# Altium PCB RF_Reader.PcbDoc
Units mil, origin at the board's own origin, x right, y up, seen from the top; angles counter-clockwise.
Board outline 2765.94 x 4340.86 mil, 2 copper layers (Top Layer, Bottom Layer); 34 components, 34 nets, 116 pads, 56 vias.
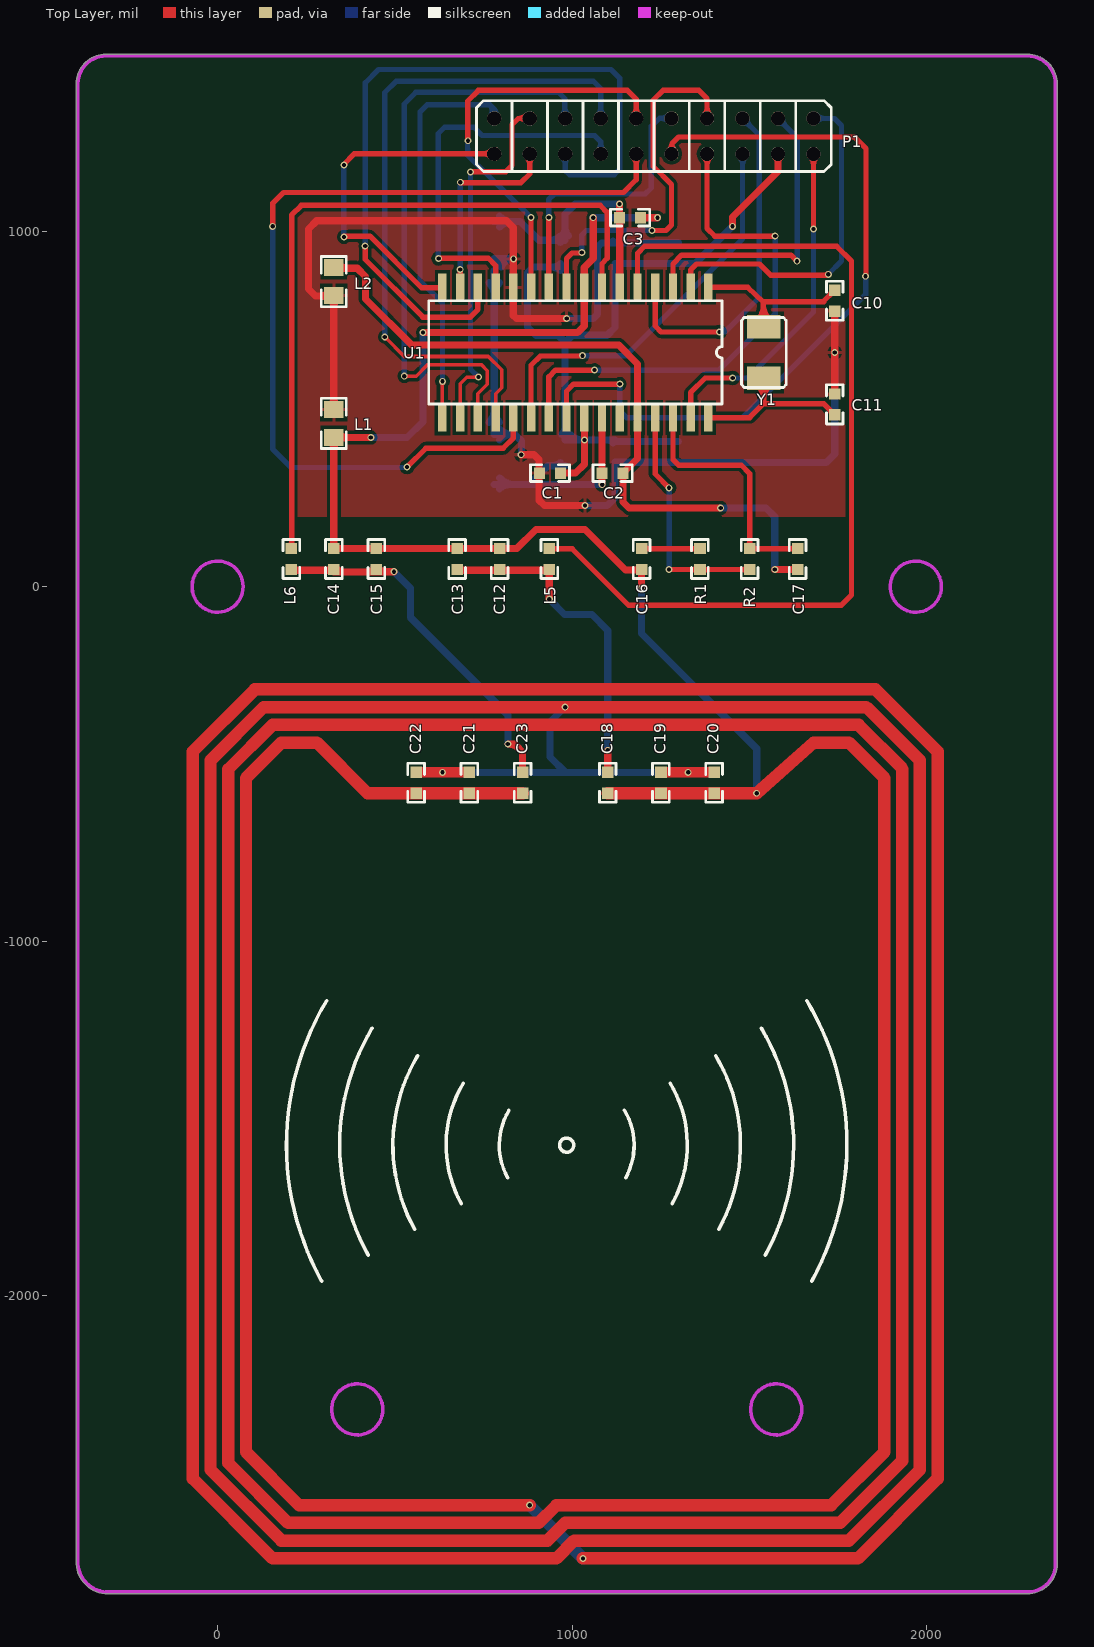
[diagram p0: Top Layer view]
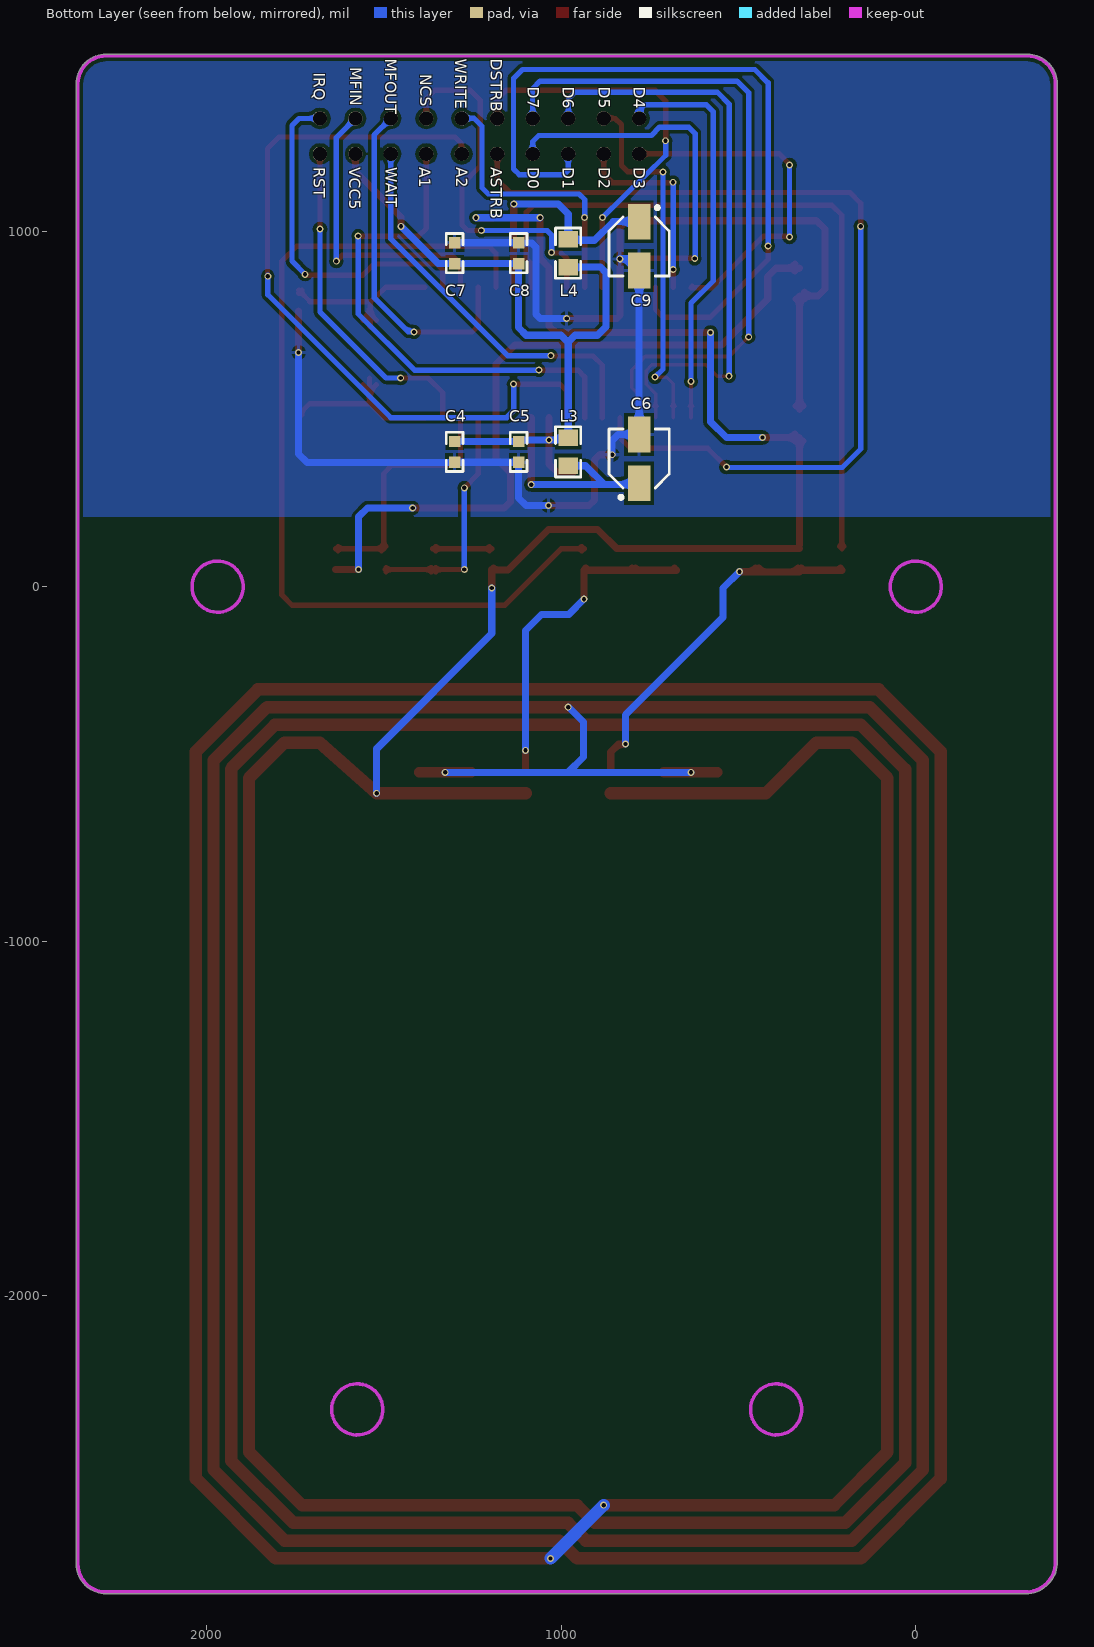
[diagram p1: Bottom Layer view, seen from below]

## Layer stack, top to bottom
Top Layer: signal copper 1.4
Dielectric: dielectric 12.6, FR-4, Dk 4.8
Bottom Layer: signal copper 1.4

## Board outline
-398.7,-2756.25 cw(c-393.7,-2755.91) -398.72,-2755.91 -398.72,1417.32 cw(c-314.96,1417.32) -314.96,1501.08 2283.46,1501.08 cw(c2283.46,1417.32) 2367.22,1417.32 2367.22,-2755.91 cw(c2283.46,-2755.91) 2283.46,-2839.66 -302.98,-2839.66 cw(c-309.06,-2750)

## Design rules (kind name [scope] priority, off if disabled: settings)
Clearance [All] p1: gap=10
MinimumSolderMaskSliver [All] p1: minsoldermaskwidth=0
PolygonConnect [All] p1: connectstyle=Relief reliefconductorwidth=10 reliefentries=4 polygonreliefangle="90 Angle"
RoutingVias [All] p1: holewidth=28 width=50 viastyle="Through Hole" minholewidth=28 minwidth=50 maxholewidth=28 maxwidth=50
SilkToSilkClearance [All] p1: silktosilkclearance=0
SilkscreenOverComponentPads [All] p1: minsilkscreentomaskgap=0
SolderMaskExpansion [All] p1: expansion=4
Width [All] p1: maxlimit=50 minlimit=8 preferedwidth=15
Width Width_Power [InNet('+5V', 'AVCC', 'VCC', '0V', 'AGND', 'GND')] p2: maxlimit=50 minlimit=20 preferedwidth=25
25 further rules are at their usual default settings.

## Components (designator, comment, footprint, x,y, rotation, side; value= is the part's Value field where it differs from the comment)
C1 "Cap" C-0603 937.26,320 r0 top
C2 "Cap" C-0603 1113.74,320 r180 top
C3 "Cap" C-0603 1163,1040 r180 top
C4 "Cap" C-0603 1300,380 r90 bottom
C5 "Cap" C-0603 1120,380 r90 bottom
C6 "Cap Pol1" CAP-4*5.5 780,360 r90 bottom
C7 "Cap" C-0603 1300,940 r270 bottom
C8 "Cap" C-0603 1120,940 r270 bottom
C9 "Cap Pol1" CAP-4*5.5 780,960 r270 bottom
C10 "Cap" C-0603 1740,806.06 r90 top
C11 "Cap" C-0603 1740,513.94 r270 top
C12 "Cap" C-0603 795.12,77.61 r270 top
C13 "Cap" C-0603 675.12,77.61 r270 top
C14 "Cap" C-0603 327.56,77.61 r90 top
C15 "Cap" C-0603 447.56,77.61 r90 top
C16 "Cap" C-0603 1195.59,77.61 r270 top
C17 "Cap" C-0603 1635.59,77.61 r90 top
C18 "Cap" C-0603 1100,-553.15 r90 top
C19 "Cap" C-0603 1250,-553.15 r270 top
C20 "Cap" C-0603 1400,-553.15 r90 top
C21 "Cap" C-0603 710,-553.15 r90 top
C22 "Cap" C-0603 560,-553.15 r90 top
C23 "Cap" C-0603 860,-553.15 r90 top
L1 "Inductor" L-0805 327.56,460 r90 top
L2 "Inductor" L-0805 327.56,860 r90 top
L3 "Inductor" L-0805 980,380 r270 bottom
L4 "Inductor" L-0805 980,940 r90 bottom
L5 "Inductor" L-0603 935.12,77.61 r270 top
L6 "Inductor" L-0603 208,77.61 r270 top
P1 "Header20" HEADER-DIP10*2 1680,1320 r270 top
R1 "Res2" R-0603 1360,77.61 r90 top
R2 "Res2" R-0603 1500,77.61 r270 top
U1 "MFRC500" SOT287-1(32pin) 1008.78,660 r270 top
Y1 "13.56MHz" XTAL-5032(2pin) 1540,660 r270 top

## Footprints (in the part's own frame and the unit in brackets; to place one, negate y for a bottom-side part, rotate by r counter-clockwise, add the part's x,y. Pads: shape width x height; smd on the part's side, far side on the other; paste and mask are expansions set on the pad)
C-0603 [mm]
  rect 0.8x0.83 smd: 1(-0.75,0) 2(0.75,0)
  silkscreen extent -1.4,-0.6 1.4,0.6
CAP-4*5.5 [mm]
  rect 2.55x1.6 smd: 1(-1.75,0) 2(1.75,0)
  silkscreen extent -2.87,-2.15 2.15,2.15
HEADER-DIP10*2 [mm]
  round 1.02 hole 1.02: 1(0,0) 2(0,-2.54) 3(0,-5.08) 4(0,-7.62) 5(0,-10.16) 6(0,-12.7) 7(0,-15.24) 8(0,-17.78) 9(0,-20.32) 10(0,-22.86) 11(2.54,-22.86) 12(2.54,-20.32) 13(2.54,-17.78) 14(2.54,-15.24) 15(2.54,-12.7) 16(2.54,-10.16) 17(2.54,-7.62) 18(2.54,-5.08) 19(2.54,-2.54) 20(2.54,0)
  silkscreen extent -1.27,-24.13 3.81,1.27
L-0603 [mm]
  rect 0.8x0.83 smd: 1(-0.75,0) 2(0.75,0)
  silkscreen extent -1.4,-0.6 1.4,0.6
L-0805 [mm]
  rect 1.2x1.4 smd: 1(-1,0) 2(1,0)
  silkscreen extent -1.8,-0.9 1.8,0.9
R-0603 [mm]
  rect 0.8x0.83 smd: 1(-0.75,0) 2(0.75,0)
  silkscreen extent -1.4,-0.6 1.4,0.6
SOT287-1(32pin) [mm]
  rect 2x0.6 smd: 1(-4.663,9.525) 2(-4.663,8.255) 3(-4.663,6.985) 4(-4.663,5.715) 5(-4.663,4.445) 6(-4.663,3.175) 8(-4.663,0.635) 9(-4.663,-0.635) 10(-4.663,-1.905) 11(-4.663,-3.175) 12(-4.663,-4.445) 13(-4.663,-5.715) 14(-4.663,-6.985) 15(-4.663,-8.255) 16(-4.663,-9.525) 17(4.663,-9.525) 18(4.663,-8.255) 19(4.663,-6.985) 20(4.663,-5.715) 21(4.663,-4.445) 22(4.663,-3.175) 23(4.663,-1.905) 24(4.663,-0.635) 25(4.663,0.635) 26(4.663,1.905) 27(4.663,3.175) 28(4.663,4.445) 29(4.663,5.715) 30(4.663,6.985) 31(4.663,8.255) 32(4.663,9.525)
  rect 2x0.6 smd mask+0.102: 7(-4.663,1.905)
  silkscreen extent -3.71,-10.5 3.69,10.5
XTAL-5032(2pin) [mm]
  rect 1.7x2.4 smd: 1(-1.85,0) 2(1.85,0)
  silkscreen extent -2.5,-1.6 2.5,1.6

## Part data
C1 C2 C3 C4 C5 C7 C8 C10 C11 C12 C13 C14 C15 C16 C17 C18 C19 C20 C21 C22 C23: "Capacitor"
C6 C9: "Polarized Capacitor (Radial)"
P1: "Output DataLine for this module."
R1 R2: "Resistor"
U1: "highly integrated reader ICs for contactless  communication on 13,56MHz"
Y1: library part XTAL, "Crystal Oscillator"

## Via types
v1: diameter 19.68, hole 11.81, Top Layer to Bottom Layer, tented both sides, 56 vias

## Nets (pads, with @x,y where several pads share a name; then routed paths per layer and width w, separated by ;. In a path a pad name is that pad's centre, name@x,y a point inside that pad or via, vN(x,y) a via of type N, cw(c..) or ccw(c..) an arc to the next point about the centre after c; other vN are vias at no path point)
0V: C3.1 C12.1 C13.1 C14.2 C15.2 C16.2 C18.1 C19.1 C19.2 C20.1 C20.2 C21.1 C21.2 C22.1 C22.2 C23.1 L1.1 U1.8 | length 37546.1
  Top Layer w20: C14.2 C13.1@669.72,107.14 ; C14.2@327.56,117.68 L1.1 ; L1.1@327.56,420 v1(431.81,420) ; v1@578.74,716 1015.21,716 1033.78,734.57 U1.8 1033.78,899.1 ; C13.1 843.36,107.14 897.64,161.42 1035.43,161.42 1149.61,47.24 1194.75,47.24 C16.2 v1@1195.59,-2.68 ; 1033.78,899.92 1059.06,925.2 v1(1059.05,1040) ; C3.1 v1(1240.16,1040) ; L1.1@317.93,411 cw(c294.67,387.74) 327.56,387.74 ; L1.1@317.93,411 cw(c294.67,387.74) 327.56,387.74 ; L1.1@317.93,411 cw(c294.67,387.74) 327.56,387.74 ; 327.56,387.75 cw(c360.44,387.75) L1.1@337.19,411 ; 327.56,387.75 cw(c360.44,387.75) L1.1@337.19,411 ; 327.56,387.75 cw(c360.44,387.75) L1.1@337.19,411 ; L1.1@341.13,411 cw(c362.86,389.26) 362.86,420 ; L1.1@341.13,411 cw(c362.86,389.26) 362.86,420 ; L1.1@341.13,411 cw(c362.86,389.26) 362.86,420 ; L1.1@341.13,430.26 ccw(c365.9,455.04) 365.9,420 ; L1.1@341.13,430.26 ccw(c365.9,455.04) 365.9,420 ; L1.1@341.13,430.26 ccw(c365.9,455.04) 365.9,420 ; 1179.09,47.24 ccw(c1179.09,64) C16.2@1190.94,52.15 ; 1179.09,47.24 ccw(c1179.09,64) C16.2@1190.94,52.15 ; 1179.09,47.24 ccw(c1179.09,64) C16.2@1190.94,52.15
  Top Layer w30: C22.2 v1(633.86,-523.62) C21.2 ; C19.1@1253.62,-523.62 C20.2
  Top Layer w35: C22.1@550,-582.68 422.68,-582.68 280,-440 180,-440 80,-540 80,-2440 230,-2590 v1(880,-2590) ; C22.1 C21.1 C23.1 ; v1(1030,-2740) 1805,-2740 2030,-2515 2030,-465 1855,-290 105,-290 -70,-465 -70,-2515 155,-2740 955,-2740 1005,-2690 1780,-2690 1980,-2490 1980,-490 1832.52,-342.52 ; C18.1 C19.2 C20.1 v1(1520,-582.68) 1680,-440 1780,-440 1880,-540 1880,-2440 1730,-2590 955,-2590 905,-2640 199.05,-2640 30,-2470.95 30,-515 155,-390 1807.32,-390 1929.13,-511.81 ; 1828.19,-340 v1(980,-340) 130,-340 -20,-490 -20,-2490 180,-2690 930,-2690 980,-2640 1755,-2640 1930,-2465 1930,-515
  Bottom Layer w20: v1(431.81,420) 534.17,420 578.74,464.57 v1@578.74,716 ; v1(633.86,-523.62) v1(1326.77,-523.62) ; v1@979.45,-339.45 937.01,-381.89 937.01,-480.63 980,-523.62 ; v1(1059.05,1040) v1(1240.16,1040) ; v1(1195.59,-3.94) 1195.59,-132.6 1520,-457.01 v1(1520,-582.68)
  Bottom Layer w35: v1(880,-2590) v1(1030,-2740)
  other v1: 578.74,716.22
+5V: C3.2 C9.1 L4.2 U1.6 | length 1251.1
  Top Layer w20: C3.2 v1@1133.47,1078.75 ; U1.6 C3.2@1133.78,1040
  Bottom Layer w20: C9.1 853.4,1028.9 853.83,1028.46 853.83,1028.34 905.79,976.38 980,976.38 980,1050.87 1008.19,1079.05 v1(1133.47,1079.05) ; C9.1@795.2,1013.7 cw(c831.9,977) 831.9,1028.9 ; C9.1@795.2,1013.7 cw(c831.9,977) 831.9,1028.9 ; C9.1@795.2,1013.7 cw(c831.9,977) 831.9,1028.9 ; C9.1@795.2,1044.1 ccw(c831.9,1080.79) 831.9,1028.9 ; C9.1@795.2,1044.1 ccw(c831.9,1080.79) 831.9,1028.9 ; C9.1@795.2,1044.1 ccw(c831.9,1080.79) 831.9,1028.9 ; 935.95,976.38 ccw(c935.95,1019.48) L4.2@966.43,989 ; 935.95,976.38 ccw(c935.95,1019.48) L4.2@966.43,989 ; 935.95,976.38 ccw(c935.95,1019.48) L4.2@966.43,989 ; 950.4,976.38 cw(c950.4,953.71) L4.2@966.43,969.74 ; 950.4,976.38 cw(c950.4,953.71) L4.2@966.43,969.74 ; 950.4,976.38 cw(c950.4,953.71) L4.2@966.43,969.74 ; L4.2@970.37,989 ccw(c947.11,1012.26) 980,1012.26 ; L4.2@970.37,989 ccw(c947.11,1012.26) 980,1012.26 ; L4.2@970.37,989 ccw(c947.11,1012.26) 980,1012.26 ; 980,1012.26 ccw(c1012.89,1012.26) L4.2@989.63,989 ; 980,1012.26 ccw(c1012.89,1012.26) L4.2@989.63,989 ; 980,1012.26 ccw(c1012.89,1012.26) L4.2@989.63,989
A1: P1.17 U1.23 | length 1600.2
  Top Layer w15: U1.23 933.78,591.26 952.76,610.24 v1(1062.99,610.24) ; P1.17 1380,1009.76 1401.57,988.19 v1(1572,988.19) ; P1.17@1371.11,1211.11 cw(c1349.63,1189.63) 1380,1189.63 ; P1.17@1371.11,1211.11 cw(c1349.63,1189.63) 1380,1189.63 ; P1.17@1371.11,1211.11 cw(c1349.63,1189.63) 1380,1189.63 ; 1380,1189.63 cw(c1410.37,1189.63) P1.17@1388.89,1211.11 ; 1380,1189.63 cw(c1410.37,1189.63) P1.17@1388.89,1211.11 ; 1380,1189.63 cw(c1410.37,1189.63) P1.17@1388.89,1211.11
  Bottom Layer w15: v1(1062.99,610.24) 1413.39,610.24 1572,768.85 v1(1572,988.19)
A2: P1.16 U1.24 | length 2296.6
  Top Layer w15: U1.24 983.78,550.71 1003.94,570.87 v1(1133.86,570.87) ; P1.16@1281,1220 1281,1249.5 ; v1@1828,875 1828,1234.99 1795.28,1267.72 1299.21,1267.72 1281,1249.5 ; P1.16@1271.82,1229.55 ccw(c1254.74,1249.5) 1281,1249.5 ; P1.16@1271.82,1229.55 ccw(c1254.74,1249.5) 1281,1249.5 ; P1.16@1271.82,1229.55 ccw(c1254.74,1249.5) 1281,1249.5 ; 1281,1247.95 ccw(c1307.95,1247.95) P1.16@1288.89,1228.89 ; 1281,1247.95 ccw(c1307.95,1247.95) P1.16@1288.89,1228.89 ; 1281,1247.95 ccw(c1307.95,1247.95) P1.16@1288.89,1228.89
  Bottom Layer w15: v1(1133.86,570.87) 1133.86,496.06 1153.54,476.38 1480.32,476.38 1827,823.06 v1@1827,878.18
  other v1: 1827,875
AGND: C2.1 C17.1 L2.2 U1.28 | length 2224.5
  Top Layer w20: L2.2@327.56,897.64 393.7,897.64 417.32,874.02 417.32,811.02 547.24,681.1 1130.9,681.1 1184,628 1184,476.43 1183.78,476.21 1183.78,360.95 C2.1@1143.05,320.22 ; C2.1 1143.27,238.62 1160.31,221.58 v1(1418.43,221.58) ; v1(1570.87,48.09) C17.1 ; L2.2@341.13,889.74 cw(c360.2,870.67) 360.2,897.64 ; L2.2@341.13,889.74 cw(c360.2,870.67) 360.2,897.64 ; L2.2@341.13,889.74 cw(c360.2,870.67) 360.2,897.64 ; L2.2@341.13,909 ccw(c368.56,936.44) 368.56,897.64 ; L2.2@341.13,909 ccw(c368.56,936.44) 368.56,897.64 ; L2.2@341.13,909 ccw(c368.56,936.44) 368.56,897.64
  Bottom Layer w20: v1(1418.43,221.58) 1546.14,221.58 1570.87,196.85 v1(1570.87,48.09)
ASTRB: P1.15 U1.21 | length 2752.4
  Top Layer w15: v1(155.25,1015.75) 155.25,1080.45 185.8,1111 1143.91,1111 1180,1147.09 P1.15 ; v1(534,337) 587,390 805,390 833.78,418.78 U1.21 ; P1.15@1171.11,1211.11 cw(c1149.63,1189.63) 1180,1189.63 ; P1.15@1171.11,1211.11 cw(c1149.63,1189.63) 1180,1189.63 ; P1.15@1171.11,1211.11 cw(c1149.63,1189.63) 1180,1189.63 ; 1180,1189.63 cw(c1210.37,1189.63) P1.15@1188.89,1211.11 ; 1180,1189.63 cw(c1210.37,1189.63) P1.15@1188.89,1211.11 ; 1180,1189.63 cw(c1210.37,1189.63) P1.15@1188.89,1211.11
  Bottom Layer w15: v1(155.25,1015.75) 155.25,388.05 207.31,336 v1@534,336
AVCC5: C2.2 C6.1 L3.2 U1.26 | length 913.6
  Top Layer w20: v1(1084.21,287.4) C2.2 U1.26@1084.21,476.43
  Bottom Layer w20: C6.1@780,287.4 v1(1084.21,287.4) ; 877.87,287.48 931.02,340.63 L3.2 ; L3.2@966.43,331 ccw(c943.18,307.74) 943.18,340.63 ccw(c943.18,373.52) L3.2@966.43,350.26 ; C6.1@795.2,275.9 cw(c822.96,248.14) 822.96,287.4 ; C6.1@795.2,275.9 cw(c822.96,248.14) 822.96,287.4 ; C6.1@795.2,275.9 cw(c822.96,248.14) 822.96,287.4 ; C6.1@795.2,306.3 ccw(c840.83,351.93) 840.83,287.4 ; C6.1@795.2,306.3 ccw(c840.83,351.93) 840.83,287.4 ; C6.1@795.2,306.3 ccw(c840.83,351.93) 840.83,287.4
D0: P1.14 U1.13 | length 1242.3
  Top Layer w15: v1@624.16,926 762.98,926 783.78,905.2 U1.13
  Bottom Layer w15: v1(623.24,925.09) 622.05,926.28 622.05,1276.89 640.43,1295.28 722.06,1295.28 745.68,1271.65 1062.99,1271.65 1080,1254.65 P1.14 ; P1.14@1071.11,1228.89 ccw(c1049.63,1250.37) 1080,1250.37 ; P1.14@1071.11,1228.89 ccw(c1049.63,1250.37) 1080,1250.37 ; P1.14@1071.11,1228.89 ccw(c1049.63,1250.37) 1080,1250.37 ; 1080,1250.37 ccw(c1110.37,1250.37) P1.14@1088.89,1228.89 ; 1080,1250.37 ccw(c1110.37,1250.37) P1.14@1088.89,1228.89 ; 1080,1250.37 ccw(c1110.37,1250.37) P1.14@1088.89,1228.89
D1: P1.13 U1.14 | length 2308.7
  Top Layer w15: v1(416.24,960.02) 416.24,922.34 578.74,759.84 712.6,759.84 733.78,781.02 U1.14
  Bottom Layer w15: v1(416.24,960.02) 416.24,1420.18 454.15,1458.09 1108.84,1458.09 1134,1432.93 1134,1177.31 1118.11,1161.42 992.13,1161.42 980,1173.54 P1.13 ; P1.13@971.11,1211.11 cw(c949.63,1189.63) 980,1189.63 ; P1.13@971.11,1211.11 cw(c949.63,1189.63) 980,1189.63 ; P1.13@971.11,1211.11 cw(c949.63,1189.63) 980,1189.63 ; 980,1189.63 cw(c1010.37,1189.63) P1.13@988.89,1211.11 ; 980,1189.63 cw(c1010.37,1189.63) P1.13@988.89,1211.11 ; 980,1189.63 cw(c1010.37,1189.63) P1.13@988.89,1211.11
D2: P1.12 U1.15 | length 702.9
  Top Layer w15: U1.15 v1@683.78,894 ; v1@684.24,1139 855.54,1139 880,1163.46 P1.12 ; P1.12@871.11,1211.11 cw(c849.63,1189.63) 880,1189.63 ; P1.12@871.11,1211.11 cw(c849.63,1189.63) 880,1189.63 ; P1.12@871.11,1211.11 cw(c849.63,1189.63) 880,1189.63 ; 880,1189.63 cw(c910.37,1189.63) P1.12@888.89,1211.11 ; 880,1189.63 cw(c910.37,1189.63) P1.12@888.89,1211.11 ; 880,1189.63 cw(c910.37,1189.63) P1.12@888.89,1211.11
  Bottom Layer w15: v1@684.24,893.09 v1(684.24,1140)
  other v1: 684,894
D3: P1.11 U1.16 | length 1182.6
  Top Layer w15: v1@354.84,1189.49 384.35,1220 P1.11 ; v1@355.33,988 429.32,988 574.8,842.52 U1.16@632.73,842.52 ; v1@357.66,984.34 cw(c366.48,975.52) 366.48,988 ; v1@357.66,984.34 cw(c366.48,975.52) 366.48,988 ; v1@357.66,984.34 cw(c366.48,975.52) 366.48,988 ; 620.84,842.52 ccw(c620.84,856.51) U1.16@630.73,846.62 ; 620.84,842.52 ccw(c620.84,856.51) U1.16@630.73,846.62 ; 620.84,842.52 ccw(c620.84,856.51) U1.16@630.73,846.62 ; 749.63,1220 ccw(c749.63,1250.37) P1.11@771.11,1228.89 ; 749.63,1220 cw(c749.63,1189.63) P1.11@771.11,1211.11 ; 749.63,1220 ccw(c749.63,1250.37) P1.11@771.11,1228.89 ; 749.63,1220 cw(c749.63,1189.63) P1.11@771.11,1211.11 ; 749.63,1220 ccw(c749.63,1250.37) P1.11@771.11,1228.89 ; 749.63,1220 cw(c749.63,1189.63) P1.11@771.11,1211.11
  Bottom Layer w15: v1@356,987 v1(356,1188.33)
  other v1: 356,986
D4: P1.10 U1.17 | length 1690.1
  Top Layer w10: U1.17 v1(633.78,578.74) ; U1.17@628.96,508.81 ccw(c617.34,520.43) 633.78,520.43 ; U1.17@628.96,508.81 ccw(c617.34,520.43) 633.78,520.43 ; U1.17@628.96,508.81 ccw(c617.34,520.43) 633.78,520.43 ; v1@630.36,575.32 cw(c622.09,567.05) 633.78,567.05 ; v1@630.36,575.32 cw(c622.09,567.05) 633.78,567.05 ; v1@630.36,575.32 cw(c622.09,567.05) 633.78,567.05 ; 633.78,520.43 ccw(c650.22,520.43) U1.17@638.6,508.81 ; 633.78,520.43 ccw(c650.22,520.43) U1.17@638.6,508.81 ; 633.78,520.43 ccw(c650.22,520.43) U1.17@638.6,508.81 ; 633.78,567.05 cw(c645.47,567.05) v1@637.2,575.32 ; 633.78,567.05 cw(c645.47,567.05) v1@637.2,575.32 ; 633.78,567.05 cw(c645.47,567.05) v1@637.2,575.32
  Bottom Layer w15: v1@633.86,578.82 633.86,799.21 570.87,862.2 570.87,1338.58 590.55,1358.27 767.72,1358.27 779.5,1346.48 ; P1.10@779.5,1319.5 779.5,1346.48 ; 766.51,1359.48 cw(c748.44,1341.4) P1.10@769.59,1327.06 ; 766.51,1359.48 cw(c748.44,1341.4) P1.10@769.59,1327.06 ; 766.51,1359.48 cw(c748.44,1341.4) P1.10@769.59,1327.06 ; P1.10@771.75,1329.5 ccw(c757.01,1346.48) 779.5,1346.48 ; P1.10@771.75,1329.5 ccw(c757.01,1346.48) 779.5,1346.48 ; P1.10@771.75,1329.5 ccw(c757.01,1346.48) 779.5,1346.48 ; 773.27,1352.71 cw(c748.68,1328.12) P1.10@782.34,1319.39 ; 773.27,1352.71 cw(c748.68,1328.12) P1.10@782.34,1319.39 ; 773.27,1352.71 cw(c748.68,1328.12) P1.10@782.34,1319.39 ; 779.34,1346.64 cw(c763.73,1331.03) P1.10@782,1318.64 ; 779.34,1346.64 cw(c763.73,1331.03) P1.10@782,1318.64 ; 779.34,1346.64 cw(c763.73,1331.03) P1.10@782,1318.64 ; 779.5,1346.48 ccw(c800.27,1346.48) P1.10@787.65,1329.99 ; 779.5,1346.48 ccw(c800.27,1346.48) P1.10@787.65,1329.99 ; 779.5,1346.48 ccw(c800.27,1346.48) P1.10@787.65,1329.99
D5: P1.9 U1.18 | length 1314.7
  Top Layer w10: U1.18 683.78,571.78 702.55,590.55 v1(735.24,590.55) ; U1.18@678.96,508.81 ccw(c667.34,520.43) 683.78,520.43 ; U1.18@678.96,508.81 ccw(c667.34,520.43) 683.78,520.43 ; U1.18@678.96,508.81 ccw(c667.34,520.43) 683.78,520.43 ; 683.78,520.43 ccw(c700.22,520.43) U1.18@688.6,508.81 ; 683.78,520.43 ccw(c700.22,520.43) U1.18@688.6,508.81 ; 683.78,520.43 ccw(c700.22,520.43) U1.18@688.6,508.81 ; 723.55,590.55 ccw(c723.55,602.24) v1@731.82,593.97 ; 723.55,590.55 cw(c723.55,578.86) v1@731.82,587.13 ; 723.55,590.55 ccw(c723.55,602.24) v1@731.82,593.97 ; 723.55,590.55 cw(c723.55,578.86) v1@731.82,587.13 ; 723.55,590.55 ccw(c723.55,602.24) v1@731.82,593.97 ; 723.55,590.55 cw(c723.55,578.86) v1@731.82,587.13
  Top Layer w15: v1@713,1170 813,1170 830,1187 830,1302.44 847.56,1320 P1.9 ; 849.63,1320 ccw(c849.63,1350.37) P1.9@871.11,1328.89 ; 849.63,1320 cw(c849.63,1289.63) P1.9@871.11,1311.11 ; 849.63,1320 ccw(c849.63,1350.37) P1.9@871.11,1328.89 ; 849.63,1320 cw(c849.63,1289.63) P1.9@871.11,1311.11 ; 849.63,1320 ccw(c849.63,1350.37) P1.9@871.11,1328.89 ; 849.63,1320 cw(c849.63,1289.63) P1.9@871.11,1311.11
  Bottom Layer w15: v1@713,1169 713,612.79 v1(735.24,590.55)
  other v1: 713,1168.72
D6: P1.8 U1.19 | length 1970.9
  Top Layer w10: v1(526.24,593.09) 559.92,593.09 591.83,625 744,625 760.09,608.91 760.09,570.09 733.78,543.78 U1.19 ; v1@529.67,589.66 cw(c537.93,581.4) 537.93,593.09 ; v1@529.67,589.66 cw(c537.93,581.4) 537.93,593.09 ; v1@529.67,589.66 cw(c537.93,581.4) 537.93,593.09 ; v1@529.67,596.51 ccw(c537.93,604.78) 537.93,593.09 ; v1@529.67,596.51 ccw(c537.93,604.78) 537.93,593.09 ; v1@529.67,596.51 ccw(c537.93,604.78) 537.93,593.09 ; U1.19@728.96,508.81 ccw(c717.34,520.43) 733.78,520.43 ; U1.19@728.96,508.81 ccw(c717.34,520.43) 733.78,520.43 ; U1.19@728.96,508.81 ccw(c717.34,520.43) 733.78,520.43 ; 733.78,520.43 ccw(c750.22,520.43) U1.19@738.6,508.81 ; 733.78,520.43 ccw(c750.22,520.43) U1.19@738.6,508.81 ; 733.78,520.43 ccw(c750.22,520.43) U1.19@738.6,508.81
  Bottom Layer w15: v1(526.24,593.09) 526.24,1360.89 559.06,1393.7 960.63,1393.7 979,1375.33 P1.8@979,1319 ; P1.8@971.11,1328.89 ccw(c952.05,1347.95) 979,1347.95 ; P1.8@971.11,1328.89 ccw(c952.05,1347.95) 979,1347.95 ; P1.8@971.11,1328.89 ccw(c952.05,1347.95) 979,1347.95 ; 979,1352.78 ccw(c1012.78,1352.78) P1.8@988.89,1328.89 ; 979,1352.78 ccw(c1012.78,1352.78) P1.8@988.89,1328.89 ; 979,1352.78 ccw(c1012.78,1352.78) P1.8@988.89,1328.89
D7: P1.7 U1.20 | length 2189
  Top Layer w10: v1(471.24,704.09) 526.61,648.72 763.28,648.72 801,611 801,561 783.78,543.78 U1.20 ; v1@471.24,699.24 cw(c471.24,687.55) 479.51,695.82 ; v1@471.24,699.24 cw(c471.24,687.55) 479.51,695.82 ; v1@471.24,699.24 cw(c471.24,687.55) 479.51,695.82 ; v1@476.09,704.09 ccw(c487.78,704.09) 479.51,695.82 ; v1@476.09,704.09 ccw(c487.78,704.09) 479.51,695.82 ; v1@476.09,704.09 ccw(c487.78,704.09) 479.51,695.82 ; U1.20@778.96,508.81 ccw(c767.34,520.43) 783.78,520.43 ; U1.20@778.96,508.81 ccw(c767.34,520.43) 783.78,520.43 ; U1.20@778.96,508.81 ccw(c767.34,520.43) 783.78,520.43 ; 783.78,520.43 ccw(c800.22,520.43) U1.20@788.6,508.81 ; 783.78,520.43 ccw(c800.22,520.43) U1.20@788.6,508.81 ; 783.78,520.43 ccw(c800.22,520.43) U1.20@788.6,508.81
  Bottom Layer w15: v1(471.24,704.09) 471.24,1392.5 503.94,1425.2 1059.05,1425.2 1080.5,1403.75 P1.7@1080.5,1320.5 ; P1.7@1071.11,1328.89 ccw(c1048.43,1351.57) 1080.5,1351.57 ; P1.7@1071.11,1328.89 ccw(c1048.43,1351.57) 1080.5,1351.57 ; P1.7@1071.11,1328.89 ccw(c1048.43,1351.57) 1080.5,1351.57 ; 1080.5,1349.16 ccw(c1109.16,1349.16) P1.7@1088.89,1328.89 ; 1080.5,1349.16 ccw(c1109.16,1349.16) P1.7@1088.89,1328.89 ; 1080.5,1349.16 ccw(c1109.16,1349.16) P1.7@1088.89,1328.89
DSTRB: P1.6 U1.11 | length 1295.5
  Top Layer w15: v1@705.24,1257 705.24,1369.24 735,1399 1155.76,1399 1180,1374.76 P1.6 ; U1.11 v1@883.78,1040.7 ; P1.6@1171.11,1328.89 ccw(c1149.63,1350.37) 1180,1350.37 ; P1.6@1171.11,1328.89 ccw(c1149.63,1350.37) 1180,1350.37 ; P1.6@1171.11,1328.89 ccw(c1149.63,1350.37) 1180,1350.37 ; 1180,1350.37 ccw(c1210.37,1350.37) P1.6@1188.89,1328.89 ; 1180,1350.37 ccw(c1210.37,1350.37) P1.6@1188.89,1328.89 ; 1180,1350.37 ccw(c1210.37,1350.37) P1.6@1188.89,1328.89
  Bottom Layer w15: v1@704.71,1256.99 705.07,1216.21 v1(883.67,1040.7)
  other v1: 706,1257
GND: C1.1 C4.1 C5.1 C6.2 C7.1 C8.1 C9.2 C10.1 C11.1 L1.2 L2.1 U1.12 | length 5833.5
  Top Layer w20: L1.2 327.56,818.9 275.59,818.9 255.91,838.58 255.91,1007.87 279.53,1031.5 814.96,1031.5 833.66,1012.8 833.66,764.76 842.52,755.91 v1(984.25,755.91) ; v1(856,371.75) 892.03,371.75 906.07,357.71 906.07,243.54 921.26,228.35 v1@1035.43,228.35 ; C11.1 C10.1 ; 286.55,818.9 ccw(c286.55,857.7) L2.1@313.99,830.26 ; 286.55,818.9 ccw(c286.55,857.7) L2.1@313.99,830.26 ; 286.55,818.9 ccw(c286.55,857.7) L2.1@313.99,830.26 ; 294.92,818.9 cw(c294.92,791.93) L2.1@313.99,811 ; 294.92,818.9 cw(c294.92,791.93) L2.1@313.99,811 ; 294.92,818.9 cw(c294.92,791.93) L2.1@313.99,811 ; L1.2@317.93,509 ccw(c294.67,532.26) 327.56,532.26 ; L1.2@317.93,509 ccw(c294.67,532.26) 327.56,532.26 ; L1.2@317.93,509 ccw(c294.67,532.26) 327.56,532.26 ; L2.1@317.93,811 cw(c294.67,787.74) 327.56,787.74 ; L2.1@317.93,811 cw(c294.67,787.74) 327.56,787.74 ; L2.1@317.93,811 cw(c294.67,787.74) 327.56,787.74 ; 327.56,532.26 ccw(c360.45,532.26) L1.2@337.19,509 ; 327.56,532.26 ccw(c360.45,532.26) L1.2@337.19,509 ; 327.56,532.26 ccw(c360.45,532.26) L1.2@337.19,509 ; 327.56,787.74 cw(c360.45,787.74) L2.1@337.19,811 ; 327.56,787.74 cw(c360.45,787.74) L2.1@337.19,811 ; 327.56,787.74 cw(c360.45,787.74) L2.1@337.19,811 ; 906.07,301.52 cw(c925.62,301.52) C1.1@911.8,315.34 ; 906.07,301.52 cw(c925.62,301.52) C1.1@911.8,315.34 ; 906.07,301.52 cw(c925.62,301.52) C1.1@911.8,315.34 ; 906.07,338.48 ccw(c925.62,338.48) C1.1@911.8,324.66 ; 906.07,338.48 ccw(c925.62,338.48) C1.1@911.8,324.66 ; 906.07,338.48 ccw(c925.62,338.48) C1.1@911.8,324.66
  Bottom Layer w20: C9.2 C6.2 838.82,428.9 856.3,411.42 v1@856.3,372.05 ; C9.2@780,924.21 v1(834.65,924.21) ; C9.2@788.11,916.11 C9.2@792.55,916.11 ; v1(984.25,755.91) 1059.06,755.91 1070.87,767.72 1070.87,956.69 1082.68,968.5 1118.98,968.5 C8.1 C7.1 ; v1(1035.45,228.33) 1098.41,228.33 1120,249.92 C5.1 C4.1 ; C4.1@1306.46,346.46 1310.4,350.39 1716.54,350.39 1740,373.86 v1(1740,660) ; C6.2@764.8,462.8 ccw(c728.1,499.49) 780,499.49 ; C6.2@764.8,462.8 ccw(c728.1,499.49) 780,499.49 ; C6.2@764.8,462.8 ccw(c728.1,499.49) 780,499.49 ; C9.2@764.8,857.2 cw(c728.1,820.51) 780,820.51 ; C9.2@764.8,857.2 cw(c728.1,820.51) 780,820.51 ; C9.2@764.8,857.2 cw(c728.1,820.51) 780,820.51 ; 780,499.49 ccw(c831.9,499.49) C6.2@795.2,462.8 ; 780,499.49 ccw(c831.9,499.49) C6.2@795.2,462.8 ; 780,499.49 ccw(c831.9,499.49) C6.2@795.2,462.8 ; 780,820.51 cw(c831.9,820.51) C9.2@795.2,857.2 ; 780,820.51 cw(c831.9,820.51) C9.2@795.2,857.2 ; 780,820.51 cw(c831.9,820.51) C9.2@795.2,857.2 ; C6.2@795.2,413.7 cw(c831.9,377) 831.9,428.9 ; C6.2@795.2,413.7 cw(c831.9,377) 831.9,428.9 ; C6.2@795.2,413.7 cw(c831.9,377) 831.9,428.9 ; C6.2@795.2,444.1 ccw(c831.9,480.79) 831.9,428.9 ; C6.2@795.2,444.1 ccw(c831.9,480.79) 831.9,428.9 ; C6.2@795.2,444.1 ccw(c831.9,480.79) 831.9,428.9 ; C9.2@799.73,901.27 cw(c834.64,886.17) v1(834.65,924.21) ; C9.2@799.73,901.27 cw(c834.64,886.17) v1(834.65,924.21) ; C9.2@799.73,901.27 cw(c834.64,886.17) v1(834.65,924.21) ; 1103.06,968.5 ccw(c1103.06,985.88) C8.1@1115.34,973.59 ; 1103.06,968.5 ccw(c1103.06,985.88) C8.1@1115.34,973.59 ; 1103.06,968.5 ccw(c1103.06,985.88) C8.1@1115.34,973.59
IRQ: P1.1 U1.2 | length 1155.8
  Top Layer w15: U1.2 1333.78,892.84 1350.39,909.45 1527.56,909.45 1559.06,877.95 v1@1720.47,877.95 ; 1709.71,877.95 ccw(c1709.71,892.65) v1@1720.1,882.26 ; 1709.71,877.95 ccw(c1709.71,892.65) v1@1720.1,882.26 ; 1709.71,877.95 ccw(c1709.71,892.65) v1@1720.1,882.26
  Bottom Layer w15: P1.1 1739.06,1320 1759,1300.06 1759,917.84 v1(1721.76,880.6) ; P1.1@1688.89,1311.11 cw(c1710.37,1289.63) 1710.37,1320 ; P1.1@1688.89,1311.11 cw(c1710.37,1289.63) 1710.37,1320 ; P1.1@1688.89,1311.11 cw(c1710.37,1289.63) 1710.37,1320 ; P1.1@1688.89,1328.89 ccw(c1710.37,1350.37) 1710.37,1320 ; P1.1@1688.89,1328.89 ccw(c1710.37,1350.37) 1710.37,1320 ; P1.1@1688.89,1328.89 ccw(c1710.37,1350.37) 1710.37,1320
MFIN: P1.2 U1.3 | length 1001.7
  Top Layer w15: U1.3 1283.78,909.76 1308.46,934.45 1616.73,934.45 v1(1633.86,917.32)
  Bottom Layer w15: P1.2 1633.86,1266.14 v1(1633.86,917.32) ; P1.2@1580,1307.42 cw(c1580,1277.05) 1601.47,1298.53 ; P1.2@1580,1307.42 cw(c1580,1277.05) 1601.47,1298.53 ; P1.2@1580,1307.42 cw(c1580,1277.05) 1601.47,1298.53 ; P1.2@1592.58,1320 ccw(c1622.95,1320) 1601.47,1298.53 ; P1.2@1592.58,1320 ccw(c1622.95,1320) 1601.47,1298.53 ; P1.2@1592.58,1320 ccw(c1622.95,1320) 1601.47,1298.53
MFOUT: P1.3 U1.4 | length 1219.4
  Top Layer w15: U1.4 1233.78,734.72 1250.5,718 v1(1415,718)
  Bottom Layer w15: v1(1415,718) 1430.6,718 1527.24,814.65 1527.24,1272.76 P1.3 ; v1@1415,720.34 ccw(c1415,763.66) 1445.63,733.03 ; v1@1415,720.34 ccw(c1415,763.66) 1445.63,733.03 ; v1@1415,720.34 ccw(c1415,763.66) 1445.63,733.03 ; P1.3@1480,1307.42 cw(c1480,1277.05) 1501.47,1298.53 ; P1.3@1480,1307.42 cw(c1480,1277.05) 1501.47,1298.53 ; P1.3@1480,1307.42 cw(c1480,1277.05) 1501.47,1298.53 ; P1.3@1492.58,1320 ccw(c1522.95,1320) 1501.47,1298.53 ; P1.3@1492.58,1320 ccw(c1522.95,1320) 1501.47,1298.53 ; P1.3@1492.58,1320 ccw(c1522.95,1320) 1501.47,1298.53
NCS: P1.4 U1.9 | length 1189.9
  Top Layer w15: U1.9 983.78,924.72 999.63,940.58 v1@1027.19,940.58 ; v1(1225,1003.94) 1263.78,1003.94 1279.53,1019.69 1279.53,1133.86 1228.35,1185.04 1228.35,1371.44 1255.91,1399 1356.91,1399 1380,1375.91 P1.4 ; P1.4@1371.11,1328.89 ccw(c1349.63,1350.37) 1380,1350.37 ; P1.4@1371.11,1328.89 ccw(c1349.63,1350.37) 1380,1350.37 ; P1.4@1371.11,1328.89 ccw(c1349.63,1350.37) 1380,1350.37 ; 1380,1350.37 ccw(c1410.37,1350.37) P1.4@1388.89,1328.89 ; 1380,1350.37 ccw(c1410.37,1350.37) P1.4@1388.89,1328.89 ; 1380,1350.37 ccw(c1410.37,1350.37) P1.4@1388.89,1328.89
  Bottom Layer w15: v1(1026.82,941.68) 1026.82,991.39 1039.37,1003.94 v1(1225,1003.94)
NetC10_2: C10.2 U1.1 Y1.1 | length 844.4
  Top Layer w15: U1.1 1494.94,843.57 1538.24,802.86 ; Y1.1@1538.24,732.83 1538.24,802.86 ; 1708.66,802.86 1538.24,802.86 ; 1708.66,804.45 C10.2@1739.9,835.69 ; Y1.1@1521.64,751.19 ccw(c1481.56,791.28) 1538.24,791.28 ; Y1.1@1521.64,751.19 ccw(c1481.56,791.28) 1538.24,791.28 ; Y1.1@1521.64,751.19 ccw(c1481.56,791.28) 1538.24,791.28 ; 1538.24,799.76 ccw(c1606.92,799.76) Y1.1@1558.36,751.19 ; 1538.24,799.76 ccw(c1606.92,799.76) Y1.1@1558.36,751.19 ; 1538.24,799.76 ccw(c1606.92,799.76) Y1.1@1558.36,751.19 ; C10.2@1725.05,820.84 ccw(c1710.3,835.59) C10.2@1731.16,835.59 ; C10.2@1725.05,820.84 ccw(c1710.3,835.59) C10.2@1731.16,835.59 ; C10.2@1725.05,820.84 ccw(c1710.3,835.59) C10.2@1731.16,835.59 ; C10.2@1726,821.79 cw(c1739.41,808.38) C10.2@1739.41,827.34 ; C10.2@1726,821.79 cw(c1739.41,808.38) C10.2@1739.41,827.34 ; C10.2@1726,821.79 cw(c1739.41,808.38) C10.2@1739.41,827.34
NetC11_2: C11.2 U1.32 Y1.2 | length 844.7
  Top Layer w15: U1.32 1500,476.38 1539.37,515.75 1708.66,515.75 C11.2 ; 1540,517.16 Y1.2 ; Y1.2@1521.64,568.81 cw(c1477.32,524.48) 1540,524.48 ; Y1.2@1521.64,568.81 cw(c1477.32,524.48) 1540,524.48 ; Y1.2@1521.64,568.81 cw(c1477.32,524.48) 1540,524.48 ; 1540,524.48 cw(c1602.68,524.48) Y1.2@1558.36,568.81 ; 1540,524.48 cw(c1602.68,524.48) Y1.2@1558.36,568.81 ; 1540,524.48 cw(c1602.68,524.48) Y1.2@1558.36,568.81 ; C11.2@1724.91,499.5 cw(c1709.82,484.41) C11.2@1731.16,484.41 ; C11.2@1724.91,499.5 cw(c1709.82,484.41) C11.2@1731.16,484.41 ; C11.2@1724.91,499.5 cw(c1709.82,484.41) C11.2@1731.16,484.41 ; C11.2@1726.34,498.07 ccw(c1739.41,511.14) C11.2@1739.41,492.66 ; C11.2@1726.34,498.07 ccw(c1739.41,511.14) C11.2@1739.41,492.66 ; C11.2@1726.34,498.07 ccw(c1739.41,511.14) C11.2@1739.41,492.66
NetC12_2: C12.2 C13.2 C18.2 L5.2 | length 1137.9
  Top Layer w20: C13.2@675.12,46.1 C12.2@795.12,46.1 ; C12.2@795.13,46.09 935.1,46.09 v1(935.12,-35.43) ; C18.2 v1(1100,-461.67) ; C13.2@679.77,52.15 ccw(c694.38,66.76) 694.38,46.1 ; C13.2@679.77,52.15 ccw(c694.38,66.76) 694.38,46.1 ; C13.2@679.77,52.15 ccw(c694.38,66.76) 694.38,46.1 ; 775.86,46.1 ccw(c775.86,66.76) C12.2@790.46,52.15 ; 775.86,46.1 ccw(c775.86,66.76) C12.2@790.46,52.15 ; 775.86,46.1 ccw(c775.86,66.76) C12.2@790.46,52.15 ; C12.2@799.77,52.15 ccw(c814.42,66.79) 814.42,46.09 ; C12.2@799.77,52.15 ccw(c814.42,66.79) 814.42,46.09 ; C12.2@799.77,52.15 ccw(c814.42,66.79) 814.42,46.09 ; 915.82,46.09 ccw(c915.82,66.79) L5.2@930.46,52.15 ; 915.82,46.09 ccw(c915.82,66.79) L5.2@930.46,52.15 ; 915.82,46.09 ccw(c915.82,66.79) L5.2@930.46,52.15
  Bottom Layer w20: v1(935.12,-35.43) 978.42,-78.74 1055.12,-78.74 1100,-123.62 v1(1100,-461.67)
NetC14_1: C14.1 C15.1 C23.2 L6.2 | length 1588.9
  Top Layer w10: C14.1@327.56,41.89 C14.1@327.56,46.1
  Top Layer w20: L6.2@208,46.1 C14.1@327.56,46.1 ; C14.1@327.56,41.89 327.56,41.09 447.56,41.09 447.56,41.89 v1(497.24,41.89) ; v1(818.24,-444.23) 837.93,-444.23 860,-466.3 C23.2@860,-524.21 ; L6.2@212.66,52.15 ccw(c227.26,66.76) 227.26,46.1 ; L6.2@212.66,52.15 ccw(c227.26,66.76) 227.26,46.1 ; L6.2@212.66,52.15 ccw(c227.26,66.76) 227.26,46.1 ; 308.3,46.1 ccw(c308.3,66.76) C14.1@322.9,52.15 ; 308.3,46.1 ccw(c308.3,66.76) C14.1@322.9,52.15 ; 308.3,46.1 ccw(c308.3,66.76) C14.1@322.9,52.15 ; C14.1@332.21,52.15 ccw(c358.93,78.87) 358.93,41.09 ; C14.1@332.21,52.15 ccw(c358.93,78.87) 358.93,41.09 ; C14.1@332.21,52.15 ccw(c358.93,78.87) 358.93,41.09 ; 416.19,41.09 ccw(c416.19,78.87) C15.1@442.9,52.15 ; 416.19,41.09 ccw(c416.19,78.87) C15.1@442.9,52.15 ; 416.19,41.09 ccw(c416.19,78.87) C15.1@442.9,52.15 ; C15.1@452.21,52.15 ccw(c476.99,76.92) 476.99,41.89 ; C15.1@452.21,52.15 ccw(c476.99,76.92) 476.99,41.89 ; C15.1@452.21,52.15 ccw(c476.99,76.92) 476.99,41.89 ; v1@818.24,-444.07 cw(c818.24,-491.21) 851.58,-457.88 ; v1@818.22,-444.07 cw(c822.89,-478.95) 847.77,-454.07 ; v1@818.24,-444.07 cw(c818.24,-491.21) 851.58,-457.88 ; v1@818.22,-444.07 cw(c822.89,-478.95) 847.77,-454.07 ; v1@818.24,-444.07 cw(c818.24,-491.21) 851.58,-457.88 ; v1@818.22,-444.07 cw(c822.89,-478.95) 847.77,-454.07
  Bottom Layer w20: v1(497.24,41.89) 543.31,-4.17 543.31,-86.61 818.24,-361.55 v1(818.24,-444.23)
NetC16_1: C16.1 R1.2 | length 354.3
  Top Layer w15: C16.1@1195.59,106.3 R1.2@1362.2,106.3 ; C16.1@1202.01,101.31 cw(c1214.06,89.27) 1214.06,106.3 ; C16.1@1202.01,101.31 cw(c1214.06,89.27) 1214.06,106.3 ; C16.1@1202.01,101.31 cw(c1214.06,89.27) 1214.06,106.3 ; C16.1@1202.01,112.97 ccw(c1218.13,129.09) 1218.13,106.3 ; C16.1@1202.01,112.97 ccw(c1218.13,129.09) 1218.13,106.3 ; C16.1@1202.01,112.97 ccw(c1218.13,129.09) 1218.13,106.3 ; 1337.46,106.3 ccw(c1337.46,129.09) R1.2@1353.58,112.97 ; 1337.46,106.3 ccw(c1337.46,129.09) R1.2@1353.58,112.97 ; 1337.46,106.3 ccw(c1337.46,129.09) R1.2@1353.58,112.97 ; 1341.53,106.3 cw(c1341.53,89.27) R1.2@1353.58,101.31 ; 1341.53,106.3 cw(c1341.53,89.27) R1.2@1353.58,101.31 ; 1341.53,106.3 cw(c1341.53,89.27) R1.2@1353.58,101.31
RST: P1.20 U1.31 | length 1099.7
  Top Layer w15: U1.31 1333.78,547.09 1374.78,588.09 v1(1452.24,588.09) ; v1(1680,1008) P1.20 ; P1.20@1671.11,1211.11 cw(c1649.63,1189.63) 1680,1189.63 ; P1.20@1671.11,1211.11 cw(c1649.63,1189.63) 1680,1189.63 ; P1.20@1671.11,1211.11 cw(c1649.63,1189.63) 1680,1189.63 ; 1680,1189.63 cw(c1710.37,1189.63) P1.20@1688.89,1211.11 ; 1680,1189.63 cw(c1710.37,1189.63) P1.20@1688.89,1211.11 ; 1680,1189.63 cw(c1710.37,1189.63) P1.20@1688.89,1211.11
  Bottom Layer w15: v1(1452.24,588.09) 1493.6,588.09 1680,774.49 v1(1680,1008)
RX: R1.1 R2.2 U1.29 | length 948.9
  Top Layer w15: U1.29 1233.78,317.4 v1@1272.8,278.38 ; v1@1273,48.09 R2.2@1495.59,48.09 ; 1339.5,48.09 ccw(c1339.5,68) R1.1@1353.58,53.92 ; 1339.5,48.09 cw(c1339.5,28.17) R1.1@1353.58,42.26 ; 1339.5,48.09 ccw(c1339.5,68) R1.1@1353.58,53.92 ; 1339.5,48.09 cw(c1339.5,28.17) R1.1@1353.58,42.26 ; 1339.5,48.09 ccw(c1339.5,68) R1.1@1353.58,53.92 ; 1339.5,48.09 cw(c1339.5,28.17) R1.1@1353.58,42.26 ; R1.1@1366.42,42.26 cw(c1380.5,28.17) 1380.5,48.09 ; R1.1@1366.42,42.26 cw(c1380.5,28.17) 1380.5,48.09 ; R1.1@1366.42,42.26 cw(c1380.5,28.17) 1380.5,48.09 ; R1.1@1366.42,53.92 ccw(c1380.5,68) 1380.5,48.09 ; R1.1@1366.42,53.92 ccw(c1380.5,68) 1380.5,48.09 ; R1.1@1366.42,53.92 ccw(c1380.5,68) 1380.5,48.09 ; 1479.49,48.09 ccw(c1479.49,68) R2.2@1493.58,53.92 ; 1479.5,48.09 cw(c1479.5,28.18) R2.2@1493.58,42.26 ; 1479.49,48.09 ccw(c1479.49,68) R2.2@1493.58,53.92 ; 1479.5,48.09 cw(c1479.5,28.18) R2.2@1493.58,42.26 ; 1479.49,48.09 ccw(c1479.49,68) R2.2@1493.58,53.92 ; 1479.5,48.09 cw(c1479.5,28.18) R2.2@1493.58,42.26
  Bottom Layer w15: v1(1273,48) v1(1273,278.58)
TX1: L5.1 U1.5 | length 2690.4
  Top Layer w15: L5.1@935.12,106.3 1000,106.3 1159.21,-52.91 1758.11,-52.91 1787.24,-23.78 1787.24,917.48 1745.28,959.45 1203.54,959.45 1183.78,939.69 U1.5 ; L5.1@941.54,101.31 cw(c953.59,89.27) 953.59,106.3 ; L5.1@941.54,101.31 cw(c953.59,89.27) 953.59,106.3 ; L5.1@941.54,101.31 cw(c953.59,89.27) 953.59,106.3 ; L5.1@941.54,112.97 ccw(c957.66,129.09) 957.66,106.3 ; L5.1@941.54,112.97 ccw(c957.66,129.09) 957.66,106.3 ; L5.1@941.54,112.97 ccw(c957.66,129.09) 957.66,106.3
TX2: L6.1 U1.7 | length 2160.9
  Top Layer w15: L6.1 208.66,107.8 208.66,1047.24 236.22,1074.8 1078.74,1074.8 1098.43,1055.12 1098.43,925.68 1083.78,909.93 U1.7 ; L6.1@202.76,112.97 ccw(c188.51,127.23) 208.66,127.23 ; L6.1@202.76,112.97 ccw(c188.51,127.23) 208.66,127.23 ; L6.1@202.76,112.97 ccw(c188.51,127.23) 208.66,127.23 ; 208.66,126.88 ccw(c228.33,126.88) L6.1@214.42,112.97 ; 208.66,126.88 ccw(c228.33,126.88) L6.1@214.42,112.97 ; 208.66,126.88 ccw(c228.33,126.88) L6.1@214.42,112.97
VCC5: C1.2 C4.2 C5.2 C7.2 C8.2 L3.1 L4.1 P1.19 U1.25 | length 2777.9
  Top Layer w20: C1.2 1008.98,320 1034,345.02 U1.25@1034,476.43 ; v1(1451.75,1015.75) 1451.75,1042.3 1580,1170.55 P1.19 ; P1.19@1572.87,1212.87 cw(c1555.67,1195.67) 1580,1195.67 ; P1.19@1572.87,1212.87 cw(c1555.67,1195.67) 1580,1195.67 ; P1.19@1572.87,1212.87 cw(c1555.67,1195.67) 1580,1195.67 ; 1580,1195.67 cw(c1604.33,1195.67) P1.19@1587.13,1212.87 ; 1580,1195.67 cw(c1604.33,1195.67) P1.19@1587.13,1212.87 ; 1580,1195.67 cw(c1604.33,1195.67) P1.19@1587.13,1212.87
  Bottom Layer w20: 980,689.29 960.63,708.66 897.64,708.66 874.02,732.28 874.02,885.83 888.82,900.63 L4.1 ; C5.2 C4.2 ; C5.2@1120,413.39 980,413.39 980,688.66 1000,708.66 1098.43,708.66 1120,730.24 C8.2 C7.2 1346.47,910.47 v1(1451.75,1015.75) ; 943.18,900.63 ccw(c943.18,933.52) L4.1@966.43,910.26 ; 943.18,900.63 cw(c943.18,867.74) L4.1@966.43,891 ; 943.18,900.63 ccw(c943.18,933.52) L4.1@966.43,910.26 ; 943.18,900.63 cw(c943.18,867.74) L4.1@966.43,891 ; 943.18,900.63 ccw(c943.18,933.52) L4.1@966.43,910.26 ; 943.18,900.63 cw(c943.18,867.74) L4.1@966.43,891 ; L3.1@970.37,429 ccw(c947.11,452.26) 980,452.26 ; L3.1@970.37,429 ccw(c947.11,452.26) 980,452.26 ; L3.1@970.37,429 ccw(c947.11,452.26) 980,452.26 ; 980,452.26 ccw(c1012.89,452.26) L3.1@989.63,429 ; 980,452.26 ccw(c1012.89,452.26) L3.1@989.63,429 ; 980,452.26 ccw(c1012.89,452.26) L3.1@989.63,429 ; L3.1@993.57,429 ccw(c1031.27,466.7) v1@1031.27,413.39 ; L3.1@993.57,429 ccw(c1031.27,466.7) v1@1031.27,413.39 ; L3.1@993.57,429 ccw(c1031.27,466.7) v1@1031.27,413.39 ; 1096.22,413.39 cw(c1096.22,386.34) C5.2@1115.34,405.46 ; 1096.22,413.39 cw(c1096.22,386.34) C5.2@1115.34,405.46 ; 1096.22,413.39 cw(c1096.22,386.34) C5.2@1115.34,405.46
  other v1: 1034,413.39
VMID: C17.2 R2.1 U1.30 | length 979.7
  Top Layer w15: U1.30 1283.78,357.95 1299.21,342.52 1476.38,342.52 1500,318.9 R2.1 C17.2 ; R2.1@1494.17,112.97 ccw(c1480.09,127.05) 1500,127.05 ; R2.1@1494.17,112.97 ccw(c1480.09,127.05) 1500,127.05 ; R2.1@1494.17,112.97 ccw(c1480.09,127.05) 1500,127.05 ; 1500,127.05 ccw(c1519.91,127.05) R2.1@1505.83,112.97 ; 1500,127.05 ccw(c1519.91,127.05) R2.1@1505.83,112.97 ; 1500,127.05 ccw(c1519.91,127.05) R2.1@1505.83,112.97 ; R2.1@1506.42,101.31 cw(c1520.5,87.23) 1520.5,107.14 ; R2.1@1506.42,101.31 cw(c1520.5,87.23) 1520.5,107.14 ; R2.1@1506.42,101.31 cw(c1520.5,87.23) 1520.5,107.14 ; R2.1@1506.42,112.97 ccw(c1520.5,127.05) 1520.5,107.14 ; R2.1@1506.42,112.97 ccw(c1520.5,127.05) 1520.5,107.14 ; R2.1@1506.42,112.97 ccw(c1520.5,127.05) 1520.5,107.14 ; 1615.09,107.14 ccw(c1615.09,127.05) C17.2@1629.17,112.97 ; 1615.09,107.14 cw(c1615.09,87.23) C17.2@1629.17,101.31 ; 1615.09,107.14 ccw(c1615.09,127.05) C17.2@1629.17,112.97 ; 1615.09,107.14 cw(c1615.09,87.23) C17.2@1629.17,101.31 ; 1615.09,107.14 ccw(c1615.09,127.05) C17.2@1629.17,112.97 ; 1615.09,107.14 cw(c1615.09,87.23) C17.2@1629.17,101.31
WAIT: P1.18 U1.22 | length 1271.6
  Top Layer w15: U1.22 883.78,623.94 909.84,650 v1@1026.65,650
  Bottom Layer w15: v1(1029,651) 1151,651 1480.1,980.1 1480.1,1219.9 P1.18 ; P1.18@1471.11,1211.11 cw(c1449.39,1189.39) 1480.1,1189.39 ; P1.18@1471.11,1211.11 cw(c1449.39,1189.39) 1480.1,1189.39 ; P1.18@1471.11,1211.11 cw(c1449.39,1189.39) 1480.1,1189.39 ; 1480.1,1189.87 cw(c1510.13,1189.87) P1.18@1488.89,1211.11 ; 1480.1,1189.87 cw(c1510.13,1189.87) P1.18@1488.89,1211.11 ; 1480.1,1189.87 cw(c1510.13,1189.87) P1.18@1488.89,1211.11
WRITE: P1.5 U1.10 | length 926.4
  Top Layer w15: U1.10 v1(933.78,1040.7)
  Bottom Layer w15: v1@933.39,1047.39 933.39,1090.87 949.52,1107 1205.43,1107 1223,1124.57 1223,1297.8 1245.7,1320.5 P1.5@1279.5,1320.5 ; 1248.43,1320.5 cw(c1248.43,1288.43) P1.5@1271.11,1311.11 ; 1248.43,1320.5 cw(c1248.43,1288.43) P1.5@1271.11,1311.11 ; 1248.43,1320.5 cw(c1248.43,1288.43) P1.5@1271.11,1311.11 ; 1250.84,1320.5 ccw(c1250.84,1349.16) P1.5@1271.11,1328.89 ; 1250.84,1320.5 ccw(c1250.84,1349.16) P1.5@1271.11,1328.89 ; 1250.84,1320.5 ccw(c1250.84,1349.16) P1.5@1271.11,1328.89
pads on no net: U1.27

## Polygon pours and split planes (outlines as drawn)
GND on Top Layer "Bottom Layer-No Net" (solid, remove dead copper, pour order 1000): -417.32,1515.75 -417.32,196.85 2381.89,196.85 2378.12,200.81 2378.12,1511.79 -413.55,1511.79 -417.32,1515.75
GND on Bottom Layer "Bottom Layer-No Net" (solid, remove dead copper, pour order 1001): -417.42,1523.62 -421.26,1519.66 -421.26,196.85 2389.76,196.85 2382.09,204.77 2382.09,1515.7 -409.75,1515.7 -417.42,1523.62

## Keep-outs
Keep-Out Layer:
  circle w10: c0,0 r72.11
  circle w10: c1968.5,0 r72.11
  circle w10: c1574.8,-2320 r72.11
  circle w10: c393.7,-2320 r72.11
  lines w10: -314.96,-2834.65 2283.46,-2834.65 ccw(c2283.46,-2755.91) 2362.2,-2755.91 2362.2,1417.32 ccw(c2283.46,1417.32) 2283.46,1496.06 -314.96,1496.06 ccw(c-314.96,1417.32) -393.7,1417.32 -393.7,-2755.91 ccw(c-309.06,-2750) -303.15,-2834.65

## Silkscreen, mask and mechanical layers (free items; w line width, h text height)
Top Overlay:
  circle w10: c984.25,-1574.8 r20
  lines w10: 293.3,-1957.8 cw(c984.25,-1574.8) 307.09,-1167.92 ; 424.5,-1885.08 cw(c984.25,-1574.8) 435.66,-1245.18 ; 555.69,-1812.36 cw(c984.25,-1574.8) 564.24,-1322.43 ; 686.88,-1739.64 cw(c984.25,-1574.8) 692.82,-1399.69 ; 818.07,-1666.92 cw(c984.25,-1574.8) 821.39,-1476.95 ; 1147.11,-1476.95 cw(c984.25,-1574.8) 1150.43,-1666.92 ; 1275.69,-1399.69 cw(c984.25,-1574.8) 1281.62,-1739.64 ; 1404.26,-1322.43 cw(c984.25,-1574.8) 1412.82,-1812.36 ; 1532.84,-1245.18 cw(c984.25,-1574.8) 1544.01,-1885.08 ; 1661.41,-1167.92 cw(c984.25,-1574.8) 1675.2,-1957.8
Bottom Overlay:
  text "DSTRB" at 1199,1488.19 h31.5 r90
  text "WRITE" at 1299,1488.19 h31.5 r90
  text "MFOUT" at 1496.06,1488.19 h31.5 r90
  text "MFIN" at 1594.49,1464.57 h31.5 r90
  text "IRQ" at 1696.85,1448.82 h31.5 r90
  text "NCS" at 1397.64,1444.88 h31.5 r90
  text "D4" at 795.28,1409.45 h31.5 r90
  text "D5" at 893.7,1409.45 h31.5 r90
  text "D6" at 996.06,1409.45 h31.5 r90
  text "D7" at 1094.49,1409.45 h31.5 r90
  text "D3" at 795.28,1181.69 h31.5 r90
  text "D2" at 893.7,1181.69 h31.5 r90
  text "D1" at 996.06,1181.69 h31.5 r90
  text "D0" at 1094.49,1181.69 h31.5 r90
  text "ASTRB" at 1198.06,1181.69 h31.5 r90
  text "A2" at 1295.06,1181.69 h31.5 r90
  text "A1" at 1400.06,1181.69 h31.5 r90
  text "WAIT" at 1495.06,1181.69 h31.5 r90
  text "VCC5" at 1597.06,1181.69 h31.5 r90
  text "RST" at 1697.06,1181.69 h31.5 r90

## Dimensions
1795.28,-421.26 to 1740.16,-2610.24 on Top Overlay
3.94,-2165.35 to 1956.69,-2181.1 on Top Overlay
-393.7,-2925.2 to 2362.2,-2874.02 on Top Overlay
-342.52,1507.87 to -401.57,-2822.83 on Top Overlay

## Text inside footprints (layer, text, board x,y; h text height)
C6: Mechanical 1 "C1" at 762.29,338.84 h31.5 r270
C9: Mechanical 1 "C1" at 797.71,981.16 h31.5 r90